# Altium PCB LM-003.PcbDoc (part 1 of 2)
Units mm, origin at the board's own origin, x right, y up, seen from the top; angles counter-clockwise.
Board outline 67.01 x 194 mm, 6 copper layers (Top Layer, +5V, Mid-Layer 1, +3.3V, Mid-Layer 2, Bottom Layer), stack 1.23 mm thick; 53 components, 75 nets, 484 pads, 4 vias.
Unrouted connection lines stored in the file: 150.
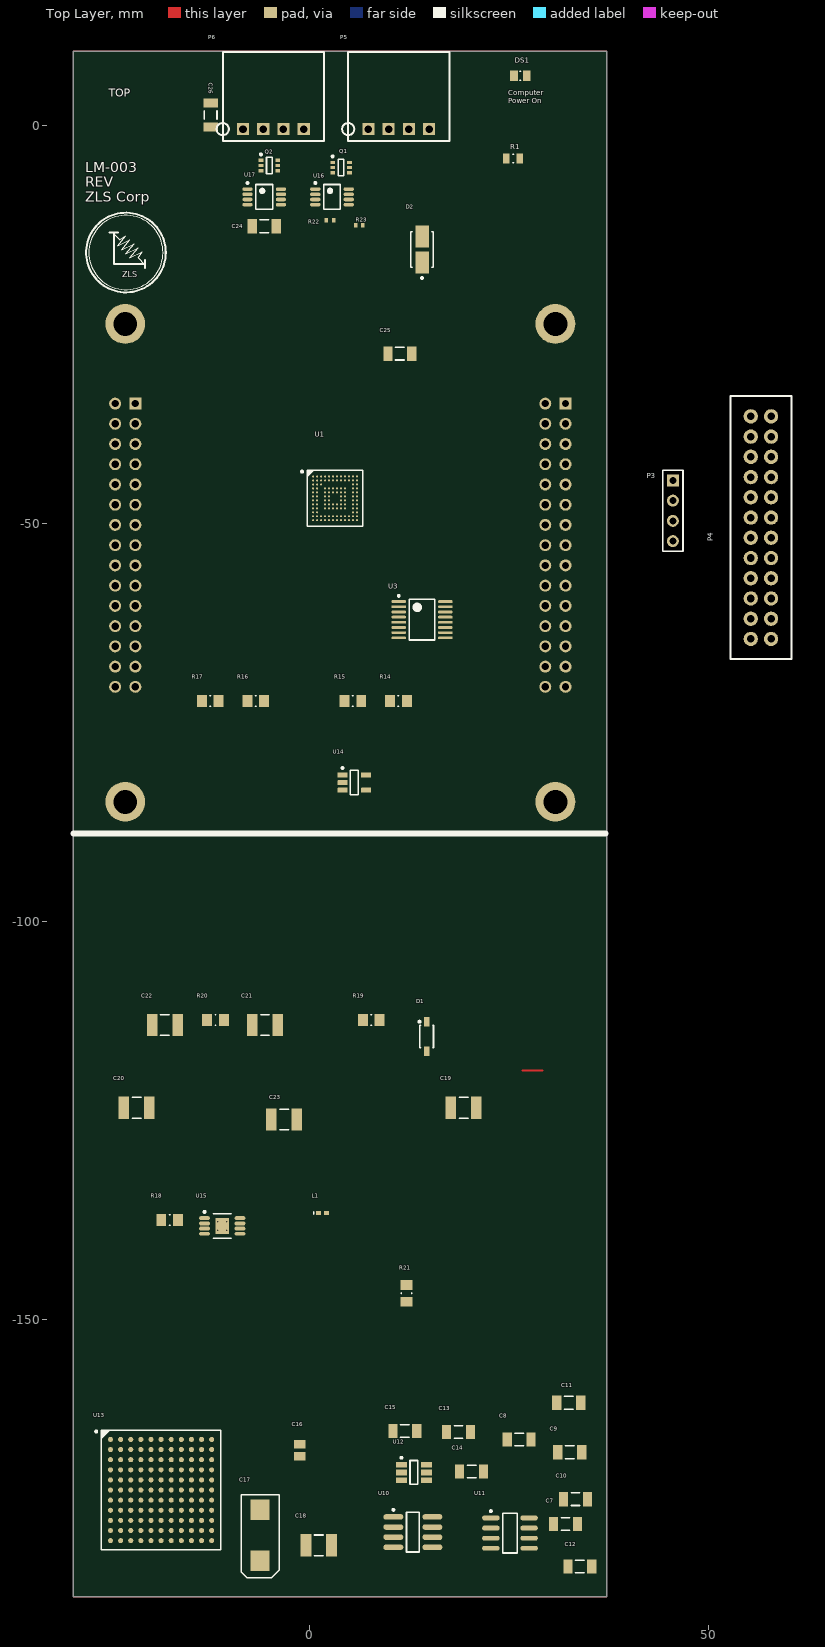
[diagram p0: Top Layer view]
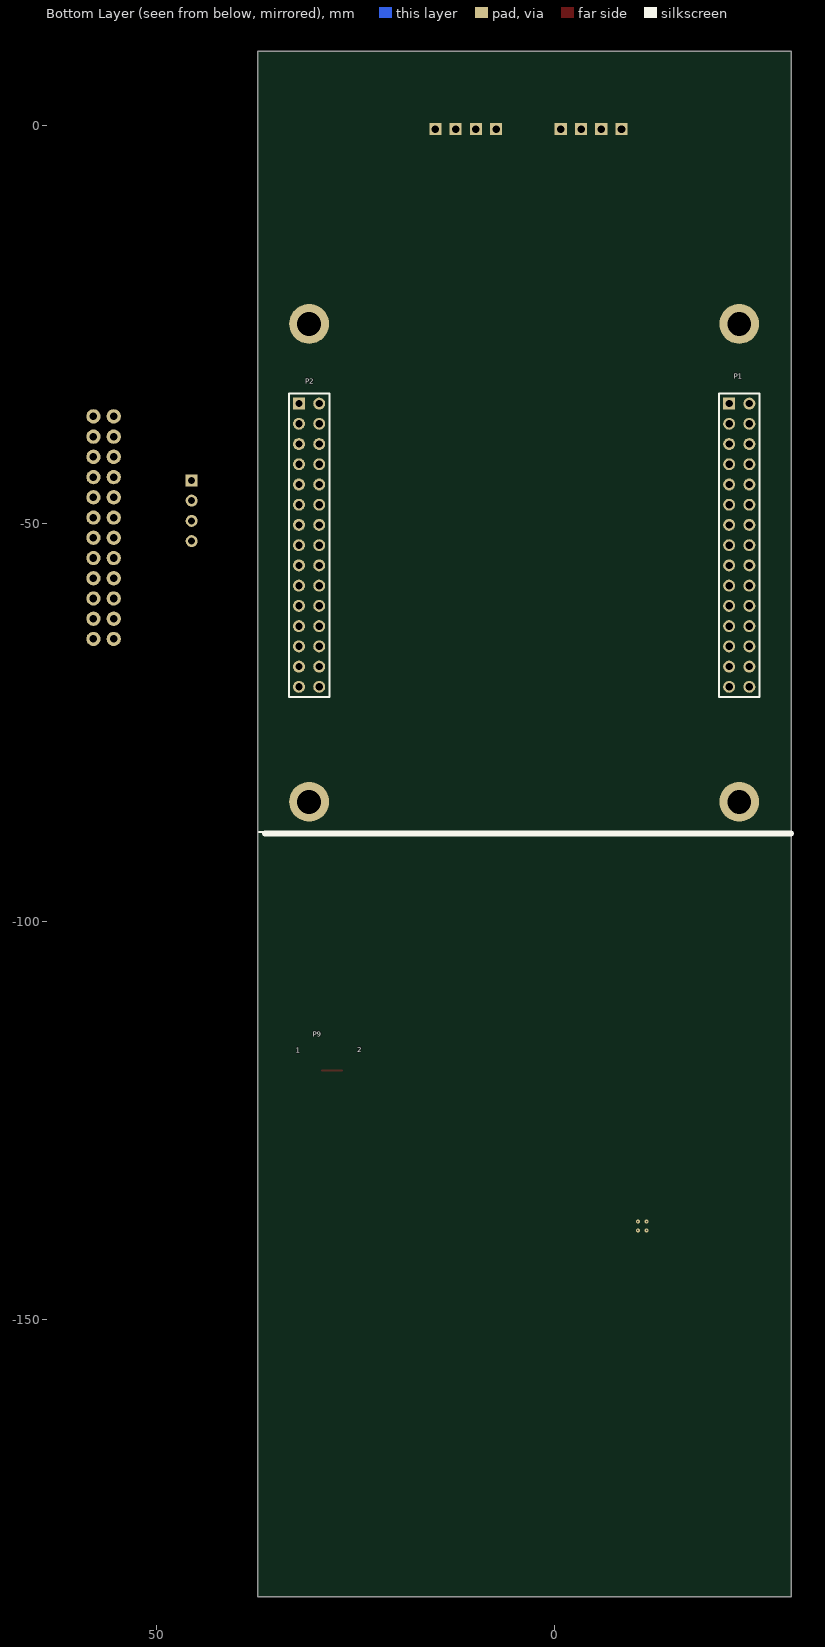
[diagram p1: Bottom Layer view, seen from below]
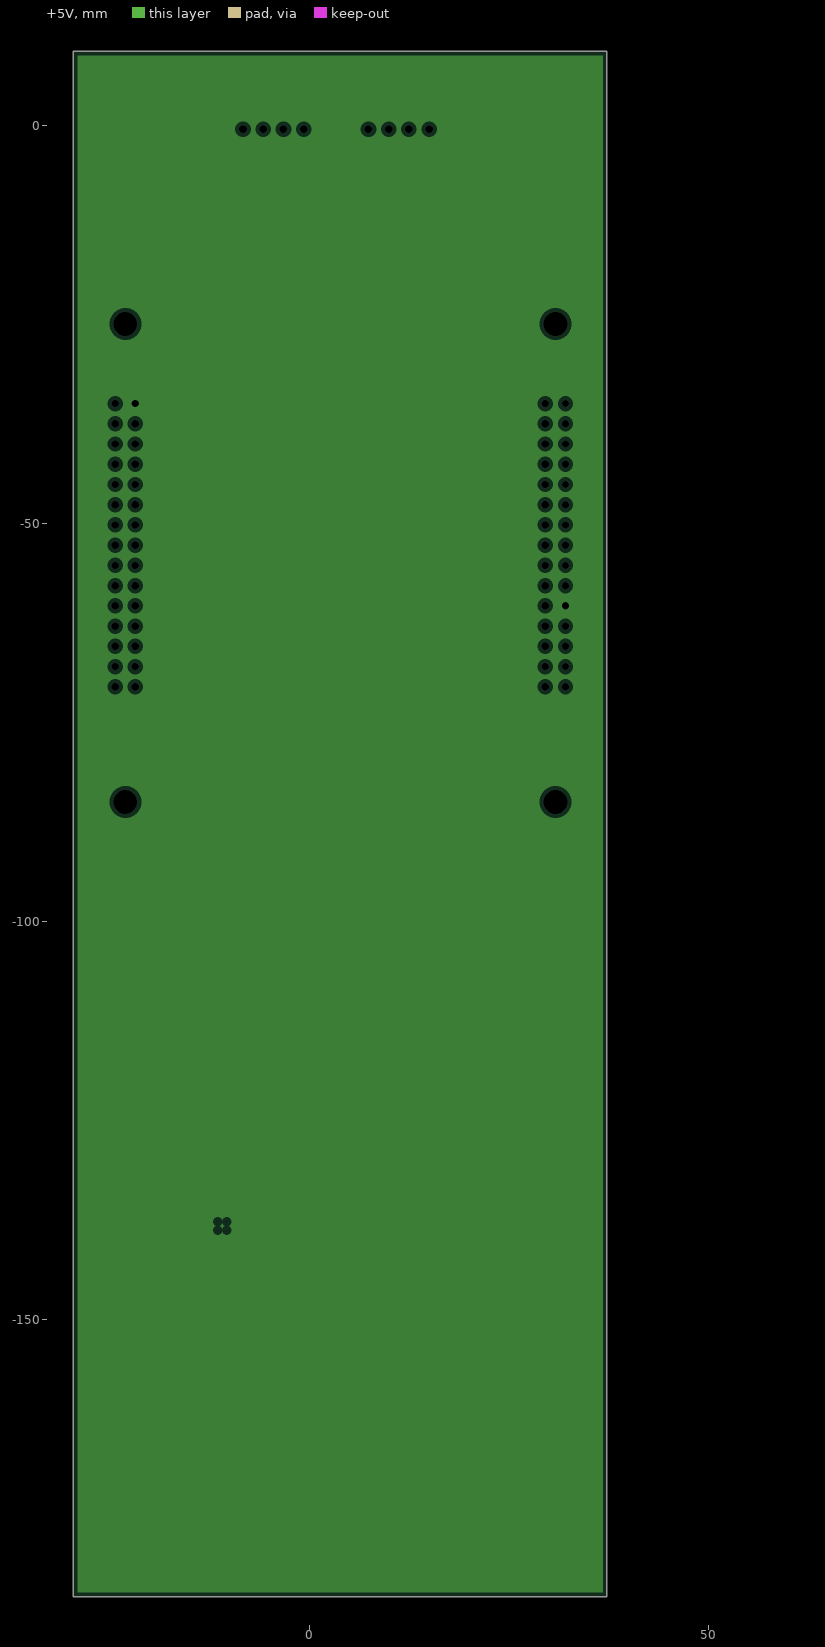
[diagram p2: +5V, clearances drawn from the general rule]
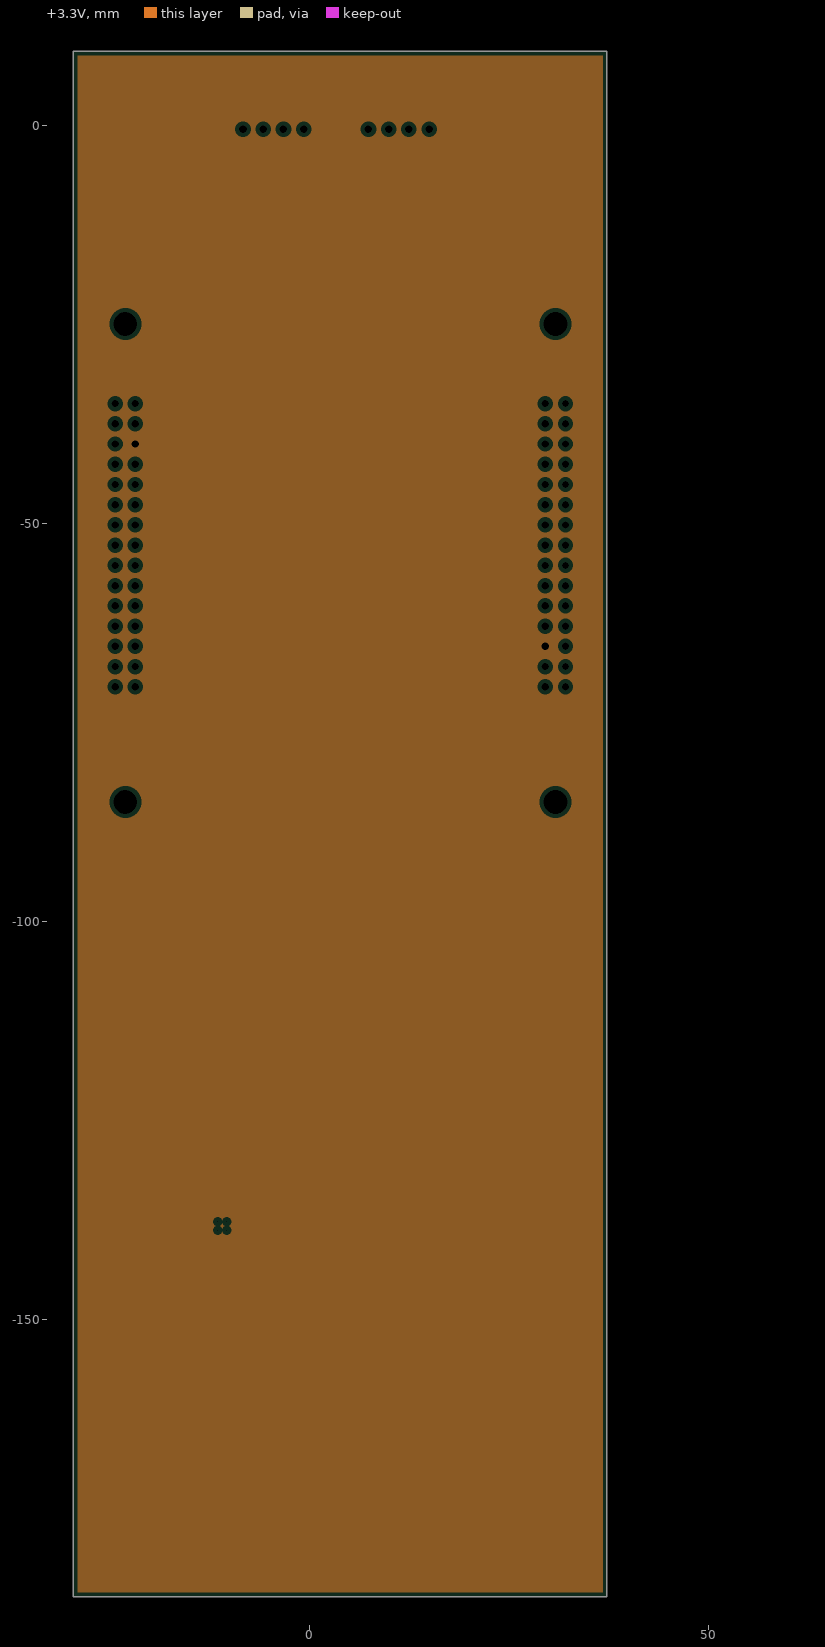
[diagram p3: +3.3V, clearances drawn from the general rule]
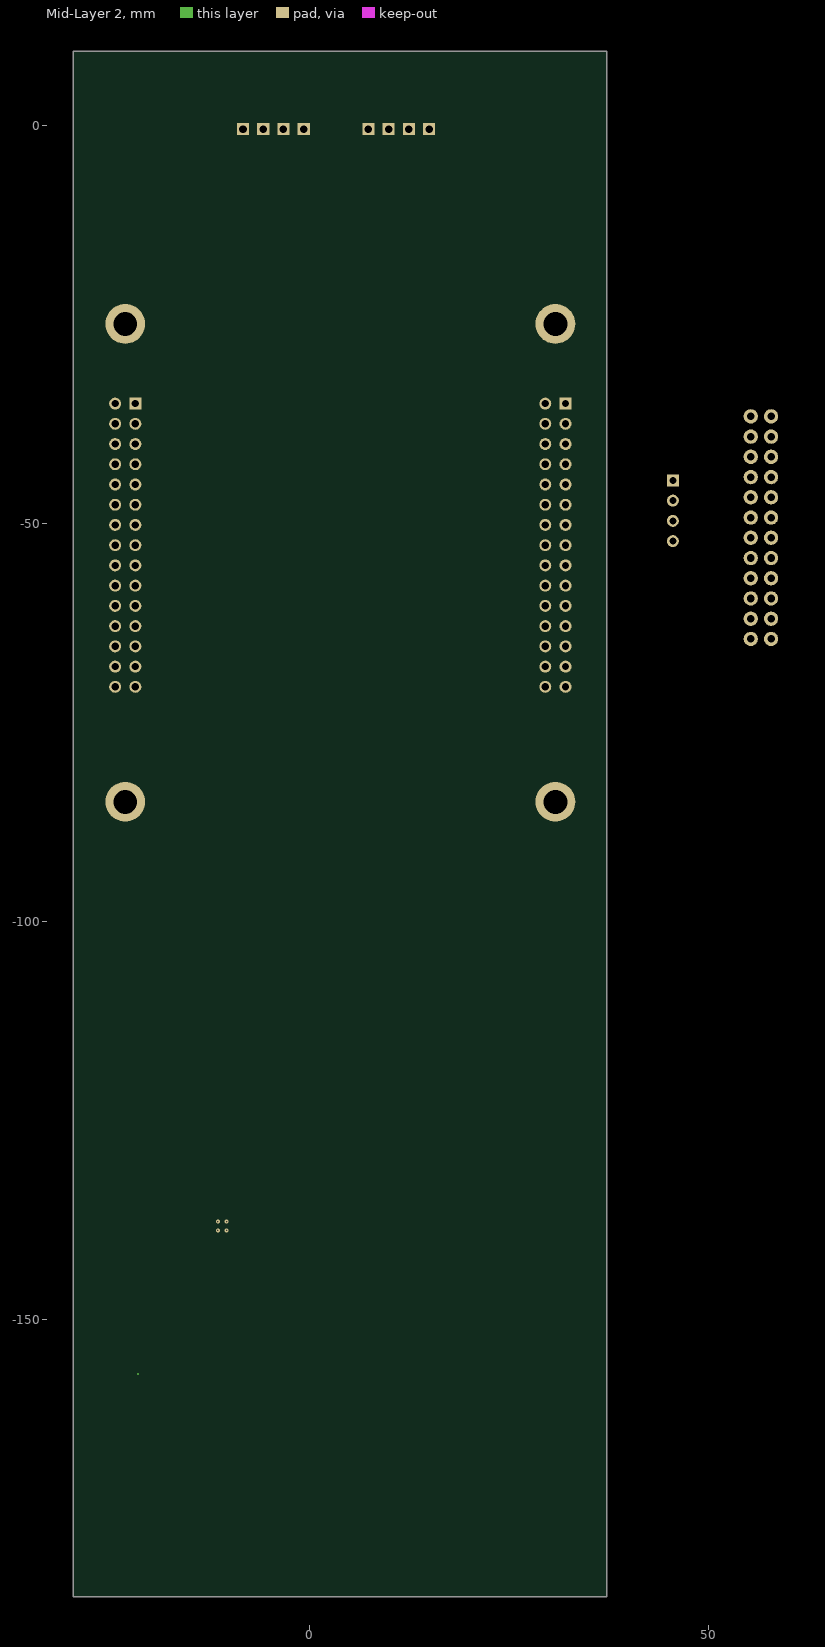
[diagram p4: Mid-Layer 2]

## Layer stack, top to bottom
Top Solder: solder mask 0.0102, Solder Resist, Dk 3.5
Top Layer: signal copper 0.0356
Dielectric 1: core 0.254, FR-4, Dk 4.2
+5V: plane copper 0.036, net +5
Dielectric 7: prepreg 0.127, Dk 4.2
Mid-Layer 1: signal copper 0.0356
Dielectric 6: core 0.254, Dk 4.2
+3.3V: plane copper 0.036, net +3.3
Dielectric2: prepreg 0.127, FR-4, Dk 4.2
Mid-Layer 2: signal copper 0.0356
Dielectric 5: core 0.254, Dk 4.2
Bottom Layer: signal copper 0.0356
Bottom Solder: solder mask 0.0102, Solder Resist, Dk 3.5

## Board outline
-29.695,-184.767 37.31,-184.767 37.31,9.234 -29.695,9.234

## Design rules (kind name [scope] priority, off if disabled: settings)
Clearance [All] p1: gap=0.127 ignorepadtopadclearanceinfootprint=FALSE except(0: Arc-Hole Track-Hole SMDPad-Hole THPad-Hole Via-Hole Fill-Hole Poly-Hole Region-Hole Text-Hole)
ComponentClearance [All] p1: gap=0.229 collisioncheckmode=3 verticalgap=0.254 showdistances=FALSE
HoleSize [All] p1: absolutevalues=TRUE maxlimit=5 minlimit=0.127 maxpercent=80.000 minpercent=20.000
MinimumAnnularRing [All] p1: minimumring=0.254
MinimumSolderMaskSliver [All] p1: minsoldermaskwidth=0.051
PlaneClearance [All] p1: clearance=0.508
PlaneConnect [All] p1: planeconnectstyle=Relief reliefexpansion=0.508 reliefentries=4 reliefconductorwidth=0.254 reliefairgap=0.254
PolygonConnect [All] p1: connectstyle=Relief reliefconductorwidth=0.254 reliefentries=4 polygonreliefangle="90 Angle" airgapwidth=0.254
RoomDefinition 36V_HV_Supply [InComponentClass('36V_HV_Supply')] p1: confinementstyle=ConfineIn formatcopy=TRUE lockcomponents=FALSE outline -26.338,-156.587 24.462,-156.587 24.462,-107.692 -26.338,-107.692
RoomDefinition System_Supply [InComponentClass('System_Supply')] p2: confinementstyle=ConfineIn formatcopy=TRUE lockcomponents=FALSE outline 6.848,-183.507 36.322,-183.507 36.322,-157.853 6.848,-157.853
RoomDefinition Power_Input_FET [InComponentClass('Power_Input_FET')] p3: confinementstyle=ConfineIn formatcopy=TRUE lockcomponents=FALSE outline -14.478,-24.952 19.856,-24.952 19.856,13.081 -14.478,13.081
RoomDefinition 12_Supply [InComponentClass('12_Supply')] p4: confinementstyle=ConfineIn formatcopy=TRUE lockcomponents=FALSE outline -28.789,-184.023 5.091,-184.023 5.091,-161.798 -28.789,-161.798
RoutingVias [All] p1: holewidth=0.3 width=0.7 viastyle="Through Hole" minholewidth=0.1 minwidth=0.381 maxholewidth=0.711 maxwidth=1.27
SilkToSilkClearance [All] p1: silktosilkclearance=0.1
SilkToSolderMaskClearance [IsPad] p1: minsilkscreentomaskgap=0.064 clearancetoexposedcopper=TRUE
SolderMaskExpansion [All] p1: expansion=0.051
Width [All] p1: maxlimit=1 minlimit=0.127 preferedwidth=0.254
23 further rules are at their usual default settings.

## Classes and differential pairs
component class MCU: U1 U3
component class Power_Input_FET: C24 C25 C26 D2 P5 P6 Q1 Q2 R22 R23 U16 U17
component class 36V_HV_Supply: C19 C20 C21 C22 C23 D1 L1 R18 R19 R20 R21 U15
component class 12_Supply: C16 C17 C18 R14 R15 R16 R17 U13 U14
component class System_Supply: C7 C8 C9 C10 C11 C12 C13 C14 C15 U10 U11 U12
component class Connectors: DS1 P1 P2 P3 P4 P14 P16 P? R1

## Components (designator, comment, footprint, x,y, rotation, side; value= is the part's Value field where it differs from the comment)
C7 "CAP CER 1UF 50V X7R 1210" CAPC1206(3216)130_N 32.11,-175.641 r0 top
C8 "CAP CER 1UF 50V X7R 1210" CAPC1206(3216)130_N 26.289,-165.018 r0 top
C9 "1uF" CAPC1206(3216)130_N 32.639,-166.624 r0 top
C10 "1uF" CAPC1206(3216)130_N 33.356,-172.503 r0 top
C11 "CAP CER 1UF 50V X7R 1210" CAPC1206(3216)130_N 32.512,-160.401 r0 top
C12 "CAP CER 1UF 50V X7R 1210" CAPC1206(3216)130_N 33.909,-180.975 r0 top
C13 "CAP CER 10UF 6.3V X5R 1206" CAPC1206(3216)130_N 18.669,-164.084 r0 top
C14 "CAP CER 10UF 6.3V X5R 1206" CAPC1206(3216)130_N 20.32,-169.037 r0 top
C15 "CAP CER 1UF 10V X5R 0805" CAPC1206(3216)130_N 11.938,-163.957 r0 top
C16 "10uF" C0805 -1.259,-166.37 r90 top
C17 "68uF" AVX-CAPC7343_V -6.223,-177.038 r90 top
C18 "4.7uF" CAPC1210(3225)100_M 1.143,-178.308 r0 top
C19 "4.7uF" CAPC1210(3225)100_M 19.315,-123.366 r0 top
C20 "4.7uF" CAPC1210(3225)100_M -21.741,-123.366 r0 top
C21 "4.7uF" CAPC1210(3225)100_M -5.612,-112.989 r0 top
C22 "4.7uF" CAPC1210(3225)100_M -18.185,-112.989 r0 top
C23 "4.7uF" CAPC1210(3225)100_M -3.224,-124.837 r0 top
C24 "CAP CER 10UF 6.3V X5R 1206" CAPC1206(3216)130_N -5.715,-12.7 r0 top
C25 "CAP CER 10UF 6.3V X5R 1206" CAPC1206(3216)130_N 11.303,-28.702 r0 top
C26 "CAP CER 10UF 6.3V X5R 1206" CAPC1206(3216)130_N -12.446,1.27 r270 top
D1 "1N5819HW-7-F" DIOD-SOD-123-2_V 14.683,-114.423 r90 top
D2 "CDBA540-HF" VISH-DO-214AC-2_M 14.097,-15.621 r90 top
DS1 "Lite-On LTST-S220KGKT Green LED, 571 nm 2012 (0805) Side View, Rectangle Lens SMD package" 0805C_L 26.444,6.182 r0 top
L1 "Inductor" 0402-A 1.585,-136.566 r0 top value=10mH
P1 "SSW-115-23-G-D" SSW-115-23-G-D -21.89,-34.966 r270 bottom locked
P2 "SSW-115-23-G-D" SSW-115-23-G-D 32.11,-34.966 r270 bottom locked
P3 "TSW-104-14-G-S" HDR1X4 45.593,-44.613 r270 top
P4 "IPL1-112-01-F-S-K" IPL1-112-01-F-S-K 56.642,-50.546 r90 top
P5 "IPL1-104-01-L-S-RA-K" IPL1-104-01-L-S-RA-K 7.366,-0.508 r0 top
P6 "IPL1-104-01-L-S-RA-K" IPL1-104-01-L-S-RA-K -8.382,-0.508 r0 top
Q1 "MCH6336-TL-E" ONSC-MCPH-6_V 3.925,-5.334 r0 top
Q2 "MCH6336-TL-E" ONSC-MCPH-6_V -5.08,-5.08 r0 top
R1 "5.1K" RESC0805(2012)_L 25.527,-4.191 r0 top
R14 "RES SMD 100K OHM 1% 1/8W 0805" RESC0805(2012)_M 11.131,-72.308 r0 top
R15 "RES SMD 100K OHM 1% 1/8W 0805" RESC0805(2012)_M 5.416,-72.308 r0 top
R16 "RES SMD 11K OHM 1% 1/8W 0805" RESC0805(2012)_M -6.776,-72.308 r0 top
R17 "RES SMD 35K OHM 1% 1/8W 0805" RESC0805(2012)_M -12.491,-72.308 r0 top
R18 "RES SMD 100K OHM 1% 1/8W 0805" RESC0805(2012)_M -17.592,-137.455 r0 top
R19 "RES SMD 100K OHM 1% 1/8W 0805" RESC0805(2012)_M 7.723,-112.354 r0 top
R20 "RES SMD 100K OHM 1% 1/8W 0805" RESC0805(2012)_M -11.835,-112.354 r0 top
R21 "RES SMD 100K OHM 1% 1/8W 0805" RESC0805(2012)_M 12.143,-146.681 r90 top
R22 "560k" RESC0402(1005)_L 2.54,-11.938 r0 top
R23 "560k" RESC0402(1005)_L 6.223,-12.573 r0 top
U1 "MSP430F6637IZQWT" TI-ZQW113 3.175,-46.863 r0 top
U3 "ADG1608BRUZ" ADI-RU-16_M 14.097,-62.103 r0 top
U10 "LT1763CS8-5#PBF" LT-S8-8_M 12.944,-176.649 r0 top
U11 "LT1763CS8-3.3#TRPBF" LT-S8-8_N 25.136,-176.776 r0 top
U12 "LTC1983ES6-5#TRMPBF" SOT95P323X100-6N 13.081,-169.164 r0 top
U13 "LTM8055IY" LT-BGA-121-15000X15000X4920 -18.664,-171.368 r0 top
U14 "OPA188AIDBVR" DBV0005A_M 5.588,-82.55 r0 top
U15 "LT8570" LT8570-MSOP -10.988,-138.217 r0 top
U16 "LTC4414EMS8#TRPBF" LT-MS8-8_L 2.794,-9.017 r0 top
U17 "LTC4414EMS8#TRPBF" LT-MS8-8_L -5.715,-9.017 r0 top

## Footprints (in the part's own frame and the unit in brackets; to place one, negate y for a bottom-side part, rotate by r counter-clockwise, add the part's x,y. Pads: shape width x height; smd on the part's side, far side on the other; paste and mask are expansions set on the pad)
0402-A [mm] "Chip Inductor, Body 1.0x0.5mm, IPC High Density"
  rect 0.6x0.5 smd: 1(-0.5,0) 2(0.5,0)
  silkscreen extent -1.1,-0.15 -1.1,0.15, body extent -0.55,-0.3 0.55,0.3, height 0.55
0805C_L [mm]
  rect 0.95x1.35 smd: 1(-0.8,0) 2(0.8,0)
  silkscreen extent -0.05,-0.58 0.05,0.58, body extent -1.1,-0.72 1.1,0.72, height 0.75
ADI-RU-16_M [mm] "SOP, 16-Leads, Body 5x4.4mm, Pitch 0.65mm, IPC Low Density"
  oval 1.85x0.35 smd: 1(-2.925,2.275) 2(-2.925,1.625) 3(-2.925,0.975) 4(-2.925,0.325) 5(-2.925,-0.325) 6(-2.925,-0.975) 7(-2.925,-1.625) 8(-2.925,-2.275) 9(2.925,-2.275) 10(2.925,-1.625) 11(2.925,-0.975) 12(2.925,-0.325) 13(2.925,0.325) 14(2.925,0.975) 15(2.925,1.625) 16(2.925,2.275)
  silkscreen extent -3.05,-2.55 1.6,3.12, body extent -2.25,-2.55 2.25,2.55, height 1.2
AVX-CAPC7343_V [mm] "SMT Capacitor, 2 Leads, Body 7.3x4.3mm"
  rect 2.6x2.4 smd: 1(-3.202,0.007) 2(3.198,0.007)
  silkscreen extent -5.33,-2.4 5.08,2.4, body extent -3.49,-2.03 3.51,2.04, height 2.9
C0805 [mm] "Chip Capacitor, Body 2.0x1.3mm, IPC High Density"
  rect 1.1x1.4 smd: 1(-0.75,0) 2(0.75,0)
  body extent -1.1,-0.72 1.1,0.72, height 1.4
CAPC1206(3216)130_N [mm] "Chip Capacitor, Body 3.2x1.6mm, Height 1.3mm, IPC Medium Density"
  rect 1.15x1.8 smd: 1(-1.5,0) 2(1.5,0)
  silkscreen extent -0.55,-0.8 0.55,0.8, body extent -1.7,-0.9 1.7,0.9, height 1.3
CAPC1210(3225)100_M [mm] "Chip Capacitor, Body 3.2x2.5mm, Height 1mm, IPC Low Density"
  rect 1.35x2.8 smd: 1(-1.6,0) 2(1.6,0)
  silkscreen extent -0.55,-1.3 0.55,1.3, body extent -1.7,-1.35 1.7,1.35, height 1
DBV0005A_M [mm] "SOT23, 5-Leads, Body 3.05x1.75mm, Pitch 0.95mm, IPC Low Density"
  rrect15% 1.2x0.65 smd: 1(-1.475,0.95) 2(-1.475,0) 3(-1.475,-0.95) 4(1.475,-0.95) 5(1.475,0.95)
  silkscreen extent -1.6,-1.55 0.5,1.95, body extent -1.42,-1.46 1.42,1.46, height 1.08
DIOD-SOD-123-2_V [mm] "SOD-123, 2-Leads, Body 2.85x1.7mm (max), Pitch 3.7mm"
  rect 1.2x0.7 smd: 1(-1.85,0) 2(1.85,0)
  silkscreen extent -1.43,-0.85 1.97,1.02, body extent -1.42,-0.85 1.43,0.85, height 1.45
HDR1X4 [mm] "Connector; Header; 4 Position"
  rect 1.5x1.5 hole 0.9: 1(0,0)
  round 1.5 hole 0.9: 2(2.54,0) 3(5.08,0) 4(7.62,0)
  silkscreen extent -1.27,-1.27 8.89,1.27
IPL1-104-01-L-S-RA-K [mil]
  rect 60x60 hole 37.4: 1(0,0) 2(100,0) 3(200,0) 4(300,0)
  silkscreen extent -130,-59 400,380, body extent -80,-12 380,380, height 258
IPL1-112-01-F-S-K [mm]
  round 1.8 hole 0.95: 1(-13.97,-1.27) 2(-13.97,1.27) 3(-11.43,-1.27) 4(-11.43,1.27) 5(-8.89,-1.27) 6(-8.89,1.27) 7(-6.35,-1.27) 8(-6.35,1.27) 9(-3.81,-1.27) 10(-3.81,1.27) 11(-1.27,-1.27) 12(-1.27,1.27) 13(1.27,-1.27) 14(1.27,1.27) 15(3.81,-1.27) 16(3.81,1.27) 17(6.35,-1.27) 18(6.35,1.27) 19(8.89,-1.27) 20(8.89,1.27) 21(11.43,-1.27) 22(11.43,1.27) 23(13.97,-1.27) 24(13.97,1.27)
  silkscreen extent -16.51,-3.81 16.51,3.81, body extent -15.95,-4.32 16.05,3.56, height 8.13
LT8570-MSOP [mm]
  oval 1.35x0.5 smd: 1(-2.225,0.975) 2(-2.225,0.325) 3(-2.225,-0.325) 4(-2.225,-0.975) 5(2.225,-0.975) 6(2.225,-0.325) 7(2.225,0.325) 8(2.225,0.975)
  rect 1.75x1.96 smd: 9(0,0)
  silkscreen extent -2.35,-1.55 1.15,1.9, body extent -2.45,-1.55 2.45,1.55, height 1.1
LT-BGA-121-15000X15000X4920 [mm] "BGA, 121-Balls, Body 15x15mm, Pitch 1.27mm"
  round 0.635 smd: A1(-6.35,6.35) A2(-5.08,6.35) A3(-3.81,6.35) A4(-2.54,6.35) A5(-1.27,6.35) A6(0,6.35) A7(1.27,6.35) A8(2.54,6.35) A9(3.81,6.35) A10(5.08,6.35) A11(6.35,6.35) B1(-6.35,5.08) B2(-5.08,5.08) B3(-3.81,5.08) B4(-2.54,5.08) B5(-1.27,5.08) B6(0,5.08) B7(1.27,5.08) B8(2.54,5.08) B9(3.81,5.08) B10(5.08,5.08) B11(6.35,5.08) C1(-6.35,3.81) C2(-5.08,3.81) C3(-3.81,3.81) C4(-2.54,3.81) C5(-1.27,3.81) C6(0,3.81) C7(1.27,3.81) C8(2.54,3.81) C9(3.81,3.81) C10(5.08,3.81) C11(6.35,3.81) D1(-6.35,2.54) D2(-5.08,2.54) D3(-3.81,2.54) D4(-2.54,2.54) D5(-1.27,2.54) D6(0,2.54) D7(1.27,2.54) D8(2.54,2.54) D9(3.81,2.54) D10(5.08,2.54) D11(6.35,2.54) E1(-6.35,1.27) E2(-5.08,1.27) E3(-3.81,1.27) E4(-2.54,1.27) E5(-1.27,1.27) E6(0,1.27) E7(1.27,1.27) E8(2.54,1.27) E9(3.81,1.27) E10(5.08,1.27) E11(6.35,1.27) F1(-6.35,0) F2(-5.08,0) F3(-3.81,0) F4(-2.54,0) F5(-1.27,0) F6(0,0) F7(1.27,0) F8(2.54,0) F9(3.81,0) F10(5.08,0) F11(6.35,0) G1(-6.35,-1.27) G2(-5.08,-1.27) G3(-3.81,-1.27) G4(-2.54,-1.27) G5(-1.27,-1.27) G6(0,-1.27) G7(1.27,-1.27) G8(2.54,-1.27) G9(3.81,-1.27) G10(5.08,-1.27) G11(6.35,-1.27) H1(-6.35,-2.54) H2(-5.08,-2.54) H3(-3.81,-2.54) H4(-2.54,-2.54) H5(-1.27,-2.54) H6(0,-2.54) H7(1.27,-2.54) H8(2.54,-2.54) H9(3.81,-2.54) H10(5.08,-2.54) H11(6.35,-2.54) J1(-6.35,-3.81) J2(-5.08,-3.81) J3(-3.81,-3.81) J4(-2.54,-3.81) J5(-1.27,-3.81) J6(0,-3.81) J7(1.27,-3.81) J8(2.54,-3.81) J9(3.81,-3.81) J10(5.08,-3.81) J11(6.35,-3.81) K1(-6.35,-5.08) K2(-5.08,-5.08) K3(-3.81,-5.08) K4(-2.54,-5.08) K5(-1.27,-5.08) K6(0,-5.08) K7(1.27,-5.08) K8(2.54,-5.08) K9(3.81,-5.08) K10(5.08,-5.08) K11(6.35,-5.08) L1(-6.35,-6.35) L2(-5.08,-6.35) L3(-3.81,-6.35) L4(-2.54,-6.35) L5(-1.27,-6.35) L6(0,-6.35) L7(1.27,-6.35) L8(2.54,-6.35) L9(3.81,-6.35) L10(5.08,-6.35) L11(6.35,-6.35)
  silkscreen extent -8.27,-7.5 7.5,7.5, body extent -7.5,-7.5 7.5,7.5, height 5.12
LT-MS8-8_L [mm] "SOP, 8-Leads, Body 3.1x3.1mm, Pitch 0.65mm, IPC High Density"
  oval 1.3x0.45 smd: 1(-2.1,0.975) 2(-2.1,0.325) 3(-2.1,-0.325) 4(-2.1,-0.975) 5(2.1,-0.975) 6(2.1,-0.325) 7(2.1,0.325) 8(2.1,0.975)
  silkscreen extent -2.22,-1.55 1.05,1.87, body extent -1.55,-1.55 1.55,1.55, height 1.1
LT-S8-8_M [mm] "SOIC, 8-Leads, Body 4.9x3.9mm, Pitch 1.27mm, IPC Low Density"
  oval 2.5x0.7 smd: 1(-2.45,1.905) 2(-2.45,0.635) 3(-2.45,-0.635) 4(-2.45,-1.905) 5(2.45,-1.905) 6(2.45,-0.635) 7(2.45,0.635) 8(2.45,1.905)
  silkscreen extent -2.57,-2.5 0.8,2.93, body extent -2,-2.5 2,2.5, height 1.76
LT-S8-8_N [mm] "SOIC, 8-Leads, Body 4.9x3.9mm, Pitch 1.27mm, IPC Medium Density"
  oval 2.2x0.6 smd: 1(-2.4,1.905) 2(-2.4,0.635) 3(-2.4,-0.635) 4(-2.4,-1.905) 5(2.4,-1.905) 6(2.4,-0.635) 7(2.4,0.635) 8(2.4,1.905)
  silkscreen extent -2.52,-2.5 0.9,2.88, body extent -2,-2.5 2,2.5, height 1.76
ONSC-MCPH-6_V [mm] "SOT23, 6-Leads, Body 2x1.6mm, Pitch 0.65mm"
  rect 0.6x0.4 smd: 1(-1.05,0.65) 2(-1.05,0) 3(-1.05,-0.65) 4(1.05,-0.65) 5(1.05,0) 6(1.05,0.65)
  silkscreen extent -1.17,-1.03 0.35,1.52, body extent -0.8,-1 0.8,1, height 0.9
RESC0402(1005)_L [mm] "Chip Resistor, Body 1.0x0.5mm, IPC High Density"
  rect 0.45x0.55 smd: 1(-0.45,0) 2(0.45,0)
  body extent -0.52,-0.27 0.53,0.28, height 0.4
RESC0805(2012)_L [mm] "Chip Resistor, Body 2.0x1.3mm, IPC High Density"
  rect 0.85x1.3 smd: 1(-0.85,0) 2(0.85,0)
  silkscreen extent -0.05,-0.55 0.05,0.55, body extent -1.1,-0.67 1.1,0.68, height 0.7
RESC0805(2012)_M [mm] "Chip Resistor, Body 2.0x1.3mm, IPC Low Density"
  rect 1.25x1.5 smd: 1(-1.05,0) 2(1.05,0)
  silkscreen extent -0.05,-0.65 0.05,0.65, body extent -1.1,-0.67 1.1,0.67, height 0.7
SOT95P323X100-6N [mm] "SOT23, 6-Leads, Body 2.90x3.23mm, Pitch 0.95mm, IPC Medium Density"
  rect 1.4x0.7 smd: 1(-1.575,0.95) 2(-1.575,0) 3(-1.575,-0.95) 4(1.575,-0.95) 5(1.575,0) 6(1.575,0.95)
  silkscreen extent -1.7,-1.5 0.5,1.97, body extent -1.92,-1.5 1.92,1.5, height 1
SSW-115-23-G-D [mm]
  rect 1.5x1.5 hole 0.92: 1(0,0)
  round 1.5 hole 0.92: 2(0,2.54) 3(2.54,0) 4(2.54,2.54) 5(5.08,0) 6(5.08,2.54) 7(7.62,0) 8(7.62,2.54) 9(10.16,0) 10(10.16,2.54) 11(12.7,0) 12(12.7,2.54) 13(15.24,0) 14(15.24,2.54) 15(17.78,0) 16(17.78,2.54) 17(20.32,0) 18(20.32,2.54) 19(22.86,0) 20(22.86,2.54) 21(25.4,0) 22(25.4,2.54) 23(27.94,0) 24(27.94,2.54) 25(30.48,0) 26(30.48,2.54) 27(33.02,0) 28(33.02,2.54) 29(35.56,0) 30(35.56,2.54)
  silkscreen extent -1.27,-1.27 36.83,3.81, body extent -1.52,-1.27 37.08,3.68, height 8.51
TI-ZQW113 [mm] "BGA, 113-Balls, Body 7x7mm, Pitch 0.5mm"
  round 0.25 smd: A1(-2.75,2.75) A2(-2.25,2.75) A3(-1.75,2.75) A4(-1.25,2.75) A5(-0.75,2.75) A6(-0.25,2.75) A7(0.25,2.75) A8(0.75,2.75) A9(1.25,2.75) A10(1.75,2.75) A11(2.25,2.75) A12(2.75,2.75) B1(-2.75,2.25) B2(-2.25,2.25) B3(-1.75,2.25) B4(-1.25,2.25) B5(-0.75,2.25) B6(-0.25,2.25) B7(0.25,2.25) B8(0.75,2.25) B9(1.25,2.25) B10(1.75,2.25) B11(2.25,2.25) B12(2.75,2.25) C1(-2.75,1.75) C2(-2.25,1.75) C3(-1.75,1.75) C11(2.25,1.75) C12(2.75,1.75) D1(-2.75,1.25) D2(-2.25,1.25) D4(-1.25,1.25) D5(-0.75,1.25) D6(-0.25,1.25) D7(0.25,1.25) D8(0.75,1.25) D9(1.25,1.25) D11(2.25,1.25) D12(2.75,1.25) E1(-2.75,0.75) E2(-2.25,0.75) E4(-1.25,0.75) E5(-0.75,0.75) E6(-0.25,0.75) E7(0.25,0.75) E8(0.75,0.75) E9(1.25,0.75) E11(2.25,0.75) E12(2.75,0.75) F1(-2.75,0.25) F2(-2.25,0.25) F4(-1.25,0.25) F5(-0.75,0.25) F8(0.75,0.25) F9(1.25,0.25) F11(2.25,0.25) F12(2.75,0.25) G1(-2.75,-0.25) G2(-2.25,-0.25) G4(-1.25,-0.25) G5(-0.75,-0.25) G8(0.75,-0.25) G9(1.25,-0.25) G11(2.25,-0.25) G12(2.75,-0.25) H1(-2.75,-0.75) H2(-2.25,-0.75) H4(-1.25,-0.75) H5(-0.75,-0.75) H6(-0.25,-0.75) H7(0.25,-0.75) H8(0.75,-0.75) H9(1.25,-0.75) H11(2.25,-0.75) H12(2.75,-0.75) J1(-2.75,-1.25) J2(-2.25,-1.25) J4(-1.25,-1.25) J5(-0.75,-1.25) J6(-0.25,-1.25) J7(0.25,-1.25) J8(0.75,-1.25) J9(1.25,-1.25) J11(2.25,-1.25) J12(2.75,-1.25) K1(-2.75,-1.75) K2(-2.25,-1.75) K11(2.25,-1.75) K12(2.75,-1.75) L1(-2.75,-2.25) L2(-2.25,-2.25) L3(-1.75,-2.25) L4(-1.25,-2.25) L5(-0.75,-2.25) L6(-0.25,-2.25) L7(0.25,-2.25) L8(0.75,-2.25) L9(1.25,-2.25) L10(1.75,-2.25) L11(2.25,-2.25) L12(2.75,-2.25) M1(-2.75,-2.75) M2(-2.25,-2.75) M3(-1.75,-2.75) M4(-1.25,-2.75) M5(-0.75,-2.75) M6(-0.25,-2.75) M7(0.25,-2.75) M8(0.75,-2.75) M9(1.25,-2.75) M10(1.75,-2.75) M11(2.25,-2.75) M12(2.75,-2.75)
  silkscreen extent -4.27,-3.5 3.5,3.5, body extent -3.5,-3.5 3.5,3.5, height 1
VISH-DO-214AC-2_M [mm] "DO-214AC, 2-Leads, Body 4.5x2.79mm, IPC Low Density"
  rect 2.8x1.7 smd: 1(-1.625,0) 2(1.625,0)
  silkscreen extent -3.7,-1.4 2.25,1.4, body extent -2.25,-1.39 2.25,1.4, height 2.29

## Part data
C7 C8: library part CMP-1037-04913-1, Capacitance=10µF, Manufacturer="Murata Electronics North America", Manufacturer Part Number=GRM32RR71H105KA01L, Operating Temperature="-55°C ~ 125°C", Package / Case="1210 (3225 Metric)", Ratings=-, Supplier Part Number 1=490-1863-6-ND, Temperature Coefficient=X7R, Tolerance=±10%, Voltage - Rated=50V, Applications="General Purpose", Category=Capacitors, ComponentLink1Description=http://search.murata.co.jp/Ceramy/image/img/A01X/G101/ENG/GRM32RR71H105KA01-01.pdf, ComponentLink1URL=http://search.murata.co.jp/Ceramy/image/img/A01X/G101/ENG/GRM32RR71H105KA01-01.pdf, Features=-, Height - Seated (Max)=-, Lead Spacing=-, Lead Style=-, Mounting Type="Surface Mount, MLCC", Packaging=Digi-Reel®, Part Status=Active, Pricing 1="1=0.35, 10=0.242, 100=0.1449, 500=0.10868 (USD)", RoHS="RoHS Compliant", Size / Dimension="0.126\" L x 0.098\" W (3.20mm x 2.50mm)", Stock 1=66890, Supplier 1=Digi-Key, Thickness (Max)="0.079\" (2.00mm)"
C9 C10: library part CMP-1037-04913-1
C11 C12: library part CMP-1037-04913-1, Capacitance=10000pF, Manufacturer="Murata Electronics North America", Manufacturer Part Number=GRM32RR71H105KA01L, Operating Temperature="-55°C ~ 125°C", Package / Case="1210 (3225 Metric)", Ratings=-, Supplier Part Number 1=490-1863-6-ND, Temperature Coefficient=X7R, Tolerance=±10%, Voltage - Rated=50V, Applications="General Purpose", Category=Capacitors, ComponentLink1Description=http://search.murata.co.jp/Ceramy/image/img/A01X/G101/ENG/GRM32RR71H105KA01-01.pdf, ComponentLink1URL=http://search.murata.co.jp/Ceramy/image/img/A01X/G101/ENG/GRM32RR71H105KA01-01.pdf, Features=-, Height - Seated (Max)=-, Lead Spacing=-, Lead Style=-, Mounting Type="Surface Mount, MLCC", Packaging=Digi-Reel®, Part Status=Active, Pricing 1="1=0.35, 10=0.242, 100=0.1449, 500=0.10868 (USD)", RoHS="RoHS Compliant", Size / Dimension="0.126\" L x 0.098\" W (3.20mm x 2.50mm)", Stock 1=66890, Supplier 1=Digi-Key, Thickness (Max)="0.079\" (2.00mm)"
C13 C14: library part CMP-1037-04913-1, Capacitance=10uF, Manufacturer="Taiyo Yuden", Manufacturer Part Number=JMK316BJ106ML-T, Operating Temperature="-55°C ~ 85°C", Package / Case="1206 (3216 Metric)", Ratings=-, Supplier Part Number 1=587-5447-1-ND, Temperature Coefficient=X5R, Tolerance=±20%, Voltage - Rated=6.3V, Applications="SMPS Filtering", Category=Capacitors, ComponentLink1Description=http://ds.yuden.co.jp/TYCOMPAS/ut/detail.do?productNo=JMK316BJ106ML-T&fileName=JMK316BJ106ML-T_SS&mode=specSheetDownload, ComponentLink1URL=http://ds.yuden.co.jp/TYCOMPAS/ut/detail.do?productNo=JMK316BJ106ML-T&fileName=JMK316BJ106ML-T_SS&mode=specSheetDownload, Failure Rate=-, Features=-, Height - Seated (Max)=-, Lead Spacing=-, Lead Style=-, Mounting Type="Surface Mount, MLCC", Notification="Current market demand for these product types have resulted in fluctuating and extending lead times. Lead times may differ.", Packaging="Cut Tape (CT)", Part Status=Active, Pricing 1="1=0.24, 10=0.161, 100=0.0817, 500=0.05592, 1000=0.04946 (USD)", RoHS="RoHS Compliant", Size / Dimension="0.126\" L x 0.063\" W (3.20mm x 1.60mm)", Stock 1=5600, Supplier 1=Digi-Key, Thickness (Max)="0.071\" (1.80mm)"
C15: library part CMP-1037-04913-1, Capacitance=1µF, Manufacturer="Taiyo Yuden", Manufacturer Part Number=LMK212BJ105MD-T, Operating Temperature="-55°C ~ 85°C", Package / Case="0805 (2012 Metric)", Ratings=-, Supplier Part Number 1=587-4918-1-ND, Temperature Coefficient=X5R, Tolerance=±20%, Voltage - Rated=10V, Applications="SMPS Filtering", Category=Capacitors, ComponentLink1Description=http://ds.yuden.co.jp/TYCOMPAS/ut/detail.do?productNo=LMK212BJ105MD-T&fileName=LMK212BJ105MD-T_SS&mode=specSheetDownload, ComponentLink1URL=http://ds.yuden.co.jp/TYCOMPAS/ut/detail.do?productNo=LMK212BJ105MD-T&fileName=LMK212BJ105MD-T_SS&mode=specSheetDownload, Failure Rate=-, Features=-, Height - Seated (Max)=-, Lead Spacing=-, Lead Style=-, Mounting Type="Surface Mount, MLCC", Notification="Current market demand for these product types have resulted in fluctuating and extending lead times. Lead times may differ.", Packaging="Cut Tape (CT)", Part Status=Active, Pricing 1="1=0.17, 10=0.121, 100=0.0567, 500=0.03976, 1000=0.03291 (USD)", RoHS="RoHS Compliant", Size / Dimension="0.079\" L x 0.049\" W (2.00mm x 1.25mm)", Stock 1=2994, Supplier 1=Digi-Key, Thickness (Max)="0.037\" (0.95mm)"
C16: library part "Cap Pol3", "Polarized Capacitor (Surface Mount)"
C17: library part CMP-0279-00002-2, "CAP TANT POLY 68UF 25V 2917", Case/Package=2917, Case Code (Metric)=7343, ESR (Equivalent Series Resistance)=50mR, Leakage Current=170uA, Manufacturer="Kyocera AVX", Manufacturer Part Number=TCJE686M025R0050, Max Operating Temperature=105°C, Min Operating Temperature=-55°C, Package Quantity=400, Supplier Part Number 1=478-9471-6-ND, Tolerance=20%, Voltage Rating=25V, Capacitance=68uF, Case Code (Imperial)=2917, ComponentLink1Description="Manufacturer URL", ComponentLink1URL=http://www.avx.com/, ComponentLink2Description=Datasheet, ComponentLink2URL=http://www.avx.com/docs/Catalogs/taj.pdf, ComponentLink3Description=http://www.avx.com/docs/catalogs/tcj.pdf?src-supplier=Avnet, ComponentLink3URL=http://www.avx.com/docs/catalogs/tcj.pdf?src-supplier=Avnet, Depth=4.3mm, Dissipation Factor=6%, Features="General Purpose", Height=4.3mm, Height - Seated (Max)=0.169inch, Length=7.3mm, Life (Hours)=2000Hour, Mount="Surface Mount", Packaging="Tape and Reel", Pricing 1="1=3.92, 10=3.163, 100=2.4672 (USD)", Radiation Hardening=No, Stock 1=439, Supplier 1=Digi-Key, Termination=SMD/SMT, Voltage Rating (DC)=25V, Width=0.169inch
C18 C19 C20 C21 C22 C23: library part CMP-1038-00619-1, "CAP CER 4.7UF 50V X7R 1210", Case/Package=1210, Case Code (Metric)=3225, Dielectric=X7R, Manufacturer=Murata, Manufacturer Part Number=GCM32ER71H475KA55K, Max Operating Temperature=125°C, Min Operating Temperature=-55°C, Package Quantity=1, Ratings=AEC-Q200, Supplier Part Number 1=490-8066-6-ND, Tolerance=10%, Voltage Rating=50V, Capacitance=4.7uF, Case Code (Imperial)=1210, ComponentLink1Description=http://search.murata.co.jp/Ceramy/image/img/A01X/partnumbering_e_02.pdf?src-supplier=Digi-Key, ComponentLink1URL=http://search.murata.co.jp/Ceramy/image/img/A01X/partnumbering_e_02.pdf?src-supplier=Digi-Key, ComponentLink2Description=http://psearch.en.murata.com/capacitor/product/GCM32ER71H475KA55%23.pdf?src-supplier=Digi-Key, ComponentLink2URL=http://psearch.en.murata.com/capacitor/product/GCM32ER71H475KA55%23.pdf?src-supplier=Digi-Key, ComponentLink3Description=http://psearch.murata.com/capacitor/product/GCM32ER71H475KA55%23.pdf?src-supplier=Avnet, ComponentLink3URL=http://psearch.murata.com/capacitor/product/GCM32ER71H475KA55%23.pdf?src-supplier=Avnet, Depth=2.5mm, Height=2.5mm, Length=3.2mm, Mount="Surface Mount", Packaging="Tape and Reel", Pricing 1="1=1.8, 10=1.424, 100=1.0676, 500=0.80666, 1000=0.71177 (USD)", Radiation Hardening=No, Stock 1=63504, Supplier 1=Digi-Key, Termination=SMD/SMT, Thickness=0.106inch, Voltage Rating (DC)=50V, Width=0.098inch
C24: library part CMP-1037-04913-1, Capacitance=22pF, Manufacturer="Taiyo Yuden", Manufacturer Part Number=JMK316BJ106ML-T, Operating Temperature="-55°C ~ 85°C", Package / Case="1206 (3216 Metric)", Ratings=-, Supplier Part Number 1=587-5447-1-ND, Temperature Coefficient=X5R, Tolerance=±20%, Voltage - Rated=6.3V, Applications="SMPS Filtering", Category=Capacitors, ComponentLink1Description=http://ds.yuden.co.jp/TYCOMPAS/ut/detail.do?productNo=JMK316BJ106ML-T&fileName=JMK316BJ106ML-T_SS&mode=specSheetDownload, ComponentLink1URL=http://ds.yuden.co.jp/TYCOMPAS/ut/detail.do?productNo=JMK316BJ106ML-T&fileName=JMK316BJ106ML-T_SS&mode=specSheetDownload, Failure Rate=-, Features=-, Height - Seated (Max)=-, Lead Spacing=-, Lead Style=-, Mounting Type="Surface Mount, MLCC", Notification="Current market demand for these product types have resulted in fluctuating and extending lead times. Lead times may differ.", Packaging="Cut Tape (CT)", Part Status=Active, Pricing 1="1=0.24, 10=0.161, 100=0.0817, 500=0.05592, 1000=0.04946 (USD)", RoHS="RoHS Compliant", Size / Dimension="0.126\" L x 0.063\" W (3.20mm x 1.60mm)", Stock 1=5600, Supplier 1=Digi-Key, Thickness (Max)="0.071\" (1.80mm)"
C25 C26: library part CMP-1037-04913-1, Capacitance=.1uF, Manufacturer="Taiyo Yuden", Manufacturer Part Number=JMK316BJ106ML-T, Operating Temperature="-55°C ~ 85°C", Package / Case="1206 (3216 Metric)", Ratings=-, Supplier Part Number 1=587-5447-1-ND, Temperature Coefficient=X5R, Tolerance=±20%, Voltage - Rated=6.3V, Applications="SMPS Filtering", Category=Capacitors, ComponentLink1Description=http://ds.yuden.co.jp/TYCOMPAS/ut/detail.do?productNo=JMK316BJ106ML-T&fileName=JMK316BJ106ML-T_SS&mode=specSheetDownload, ComponentLink1URL=http://ds.yuden.co.jp/TYCOMPAS/ut/detail.do?productNo=JMK316BJ106ML-T&fileName=JMK316BJ106ML-T_SS&mode=specSheetDownload, Failure Rate=-, Features=-, Height - Seated (Max)=-, Lead Spacing=-, Lead Style=-, Mounting Type="Surface Mount, MLCC", Notification="Current market demand for these product types have resulted in fluctuating and extending lead times. Lead times may differ.", Packaging="Cut Tape (CT)", Part Status=Active, Pricing 1="1=0.24, 10=0.161, 100=0.0817, 500=0.05592, 1000=0.04946 (USD)", RoHS="RoHS Compliant", Size / Dimension="0.126\" L x 0.063\" W (3.20mm x 1.60mm)", Stock 1=5600, Supplier 1=Digi-Key, Thickness (Max)="0.071\" (1.80mm)"
D1: library part CMP-0303-00003-1, "1.0 A Surface Mount Schottky Barrier Rectifier, 40 V, -65 to 125 degC, 2-Pin SOD-123 Package, RoHS, Tape and Reel", @ Terminal Temperature TT (degC)=90, Forward Voltage Drop VF (V)=0.45, Manufacturer="Diodes Inc", Maximum Average Rectified Current IO (A)=1, Maximum Reverse Current IR (uA)=50, Operating and Storage Temperature Range="-65 to 125 degC", Peak Forward Surge Current IFSM (A)=25, Peak Repetitive Reverse Voltage VRRM (V)=40, @ IF (A)=1, @ VR (V)=40, ComponentLink1Description="Manufacturer URL", ComponentLink1URL=http://www.diodes.com/, ComponentLink2Description=Datasheet, ComponentLink2URL=http://www.diodes.com/datasheets/ds30217.pdf, DatasheetVersion="Rev. 15-2", Mounting Technology="Surface Mount", PackageDescription="2-Pin SOD-123, Body 2.7 x 1.55 mm, Pitch 3.7 mm", PackageReference=SOD-123-2, Packing="Tape and Reel", PartNumber=1N5819HW-7-F, RoHS=TRUE, Total Capacitance CT (pF)=50, VR (RMS) (V)=28
D2: library part "D Schottky", "DIODE SCHOTTKY 40V 5A DO214AB", Capacitance @ Vr, F="380pF @ 4V, 1MHz", Current - Average Rectified (Io)=5A, Manufacturer="Comchip Technology", Operating Temperature - Junction="-50°C ~ 150°C", Package / Case="DO-214AC, SMA", Supplier Device Package="DO-214AC (SMA)", Supplier Part Number 1=641-1707-6-ND, Category="Discrete Semiconductor Products", ComponentLink1Description=http://www.comchiptech.com/cms/UserFiles/CDBA540-HF%20Thru505315.%20CDBA5200-HF%20RevC.pdf, ComponentLink1URL=http://www.comchiptech.com/cms/UserFiles/CDBA540-HF%20Thru505315.%20CDBA5200-HF%20RevC.pdf, Diode Type=Schottky, Manufacturer Part Number=CDBA540-HF, Mounting Type="Surface Mount", Packaging=Digi-Reel®, Part Status=Active, Pricing 1="1=0.49, 10=0.381, 25=0.3208, 100=0.2612, 250=0.2164, 500=0.1791, 1000=0.13432, 2500=0.12313 (USD)", RoHS="RoHS Compliant", Speed="Fast Recovery =< 500ns, > 200mA (Io)", Stock 1=7367, Supplier 1=Digi-Key
DS1: library part "LED A/K", Case/Package=0805, Case Code (Metric)=2012, Colour=Green, Forward Current=20mA, Forward Voltage=2V, Lens Colour=Colorless, Manufacturer="Vishay / Lite-On", Manufacturer Part Number=LTST-S220KGKT, Max Operating Temperature=85°C, Min Operating Temperature=-55°C, Package Quantity=4000, Power Dissipation=75W, Power Rating=75mW, Supplier Part Number 1=160-1468-1-ND, Case Code (Imperial)=0805, ComponentLink1Description=https://datasheet.ciiva.com/11775/0900766b80dc0b70-11775441.pdf, ComponentLink1URL=https://datasheet.ciiva.com/11775/0900766b80dc0b70-11775441.pdf, ComponentLink2Description=https://datasheet.ciiva.com/2110/s-110-ltst-s220kgkt-2110069.pdf, ComponentLink2URL=https://datasheet.ciiva.com/2110/s-110-ltst-s220kgkt-2110069.pdf, ComponentLink3Description=https://datasheet.ciiva.com/2110/s-110-ltst-s220kgkt-2110070.pdf, ComponentLink3URL=https://datasheet.ciiva.com/2110/s-110-ltst-s220kgkt-2110070.pdf, ComponentLink4Description=https://datasheet.ciiva.com/12400/100-ltst-s220kgkt-59602-12400886.pdf, ComponentLink4URL=https://datasheet.ciiva.com/12400/100-ltst-s220kgkt-59602-12400886.pdf, ComponentLink5Description=https://datasheet.ciiva.com/2110/s-110-ltst-s220kgkt-2110071.pdf, ComponentLink5URL=https://datasheet.ciiva.com/2110/s-110-ltst-s220kgkt-2110071.pdf, ComponentLink6Description=https://datasheet.ciiva.com/16379/ltst-s220kgkt-16379082.pdf, ComponentLink6URL=https://datasheet.ciiva.com/16379/ltst-s220kgkt-16379082.pdf, Depth=0.6mm, Dominant Wavelength=568nm, Height=0.6mm, Illumination Colour=Green, Lead Free="Lead Free", Length=2.1mm, Lens Style=Diffused,Colorless, Lens Transparency=Clear, Luminous Intensity=35mcd, Mount="Surface Mount", Number of Elements=1, Number of LEDs=1, Number of Pins=2, Packaging="Tape and Reel", Pricing 1="1=0.29, 10=0.212, 25=0.1564, 100=0.1117, 250=0.0759, 500=0.067, 1000=0.0525 (USD)", Radiation Hardening=No, Stock 1=74800, Supplier 1=Digi-Key, Test Current=20mA, Viewing Angle=130°, Wavelength=574nm, Width=1mm
P1 P2: library part "Header 15X2", "Header, 15-Pin, Dual row", Current Rating="5.7A per Contact", Insulation Color=Black, Manufacturer="Samtec Inc.", Material Flammability Rating="UL94 V-0", Operating Temperature="-55°C ~ 125°C", Supplier Part Number 1=SSW-115-23-G-D-ND, Voltage Rating=-, Applications=-, Category="Connectors, Interconnects", Connector Type=Receptacle, Contact Finish - Mating=Gold, Contact Finish - Post=Gold, Contact Finish Thickness - Mating="20.0µin (0.51µm)", Contact Finish Thickness - Post="3.00µin (0.076µm)", Contact Length - Post="0.394\" (10.00mm)", Contact Material="Phosphor Bronze", Contact Shape=Square, Contact Type=Forked, Fastening Type=Push-Pull, Features=-, Ingress Protection=-, Insulation Height="0.335\" (8.51mm)", Insulation Material="Liquid Crystal Polymer (LCP)", Manufacturer Part Number=SSW-115-23-G-D, Mated Stacking Heights=-, Mounting Type="Through Hole", Number of Positions=30, Number of Positions Loaded=All, Packaging=Bulk, Part Status=Active, Pitch - Mating="0.100\" (2.54mm)", Pricing 1="1=5.3 (USD)", RoHS="RoHS Compliant", Row Spacing - Mating="0.100\" (2.54mm)", Stock 1=0, Style="Board to Board or Cable", Supplier 1=Digi-Key, Termination=Solder
P3: library part "Header 4", "Header, 4-Pin", Current Rating=-, Insulation Color=Black, Manufacturer="Samtec Inc.", Material Flammability Rating="UL94 V-0", Operating Temperature="-55°C ~ 125°C", Supplier Part Number 1=SAM1053-04-ND, Applications=-, Category="Connectors, Interconnects", ComponentLink1Description=http://suddendocs.samtec.com/prints/tsw-xxx-xx-xxx-x-xx-xxx-mkt.pdf, ComponentLink1URL=http://suddendocs.samtec.com/prints/tsw-xxx-xx-xxx-x-xx-xxx-mkt.pdf, Connector Type=Header, Contact Finish - Mating=Gold, Contact Finish - Post=Gold, Contact Finish Thickness - Mating="10.0µin (0.25µm)", Contact Finish Thickness - Post="3.00µin (0.076µm)", Contact Length - Mating="0.320\" (8.13mm)", Contact Length - Post="0.110\" (2.79mm)", Contact Material="Phosphor Bronze", Contact Shape=Square, Contact Type="Male Pin", Fastening Type=Push-Pull, Features=-, Ingress Protection=-, Insulation Height="0.100\" (2.54mm)", Insulation Material="Polybutylene Terephthalate (PBT)", Manufacturer Part Number=TSW-104-14-G-S, Mated Stacking Heights=-, Mounting Type="Through Hole", Number of Positions=4, Number of Positions Loaded=All, Number of Rows=1, Overall Contact Length="0.530\" (13.46mm)", Packaging=Bulk, Part Status=Active, Pitch - Mating="0.100\" (2.54mm)", Pricing 1="1=1.02, 10=0.915, 100=0.7537, 500=0.59578, 1000=0.51143, 5000=0.46657, 10000=0.44863 (USD)", RoHS="RoHS Compliant", Row Spacing - Mating=-, Shrouding=Unshrouded, Stock 1=278, Style="Board to Board or Cable", Supplier 1=Digi-Key, Termination=Solder, Voltage Rating=-
P4: "IPL1-112-01-F-D-K", Manufacturer="Samtec Inc.", Supplier Part Number 1=IPL1-112-01-F-S-K-ND, Category="Connectors, Interconnects", Manufacturer Part Number=IPL1-112-01-F-S-K, Part Status=Active, Pricing 1="1=2.63 (USD)", RoHS="RoHS Compliant", Stock 1=0, Supplier 1=Digi-Key
P5 P6: Current Rating=-, Insulation Color=Natural, Manufacturer="Samtec Inc.", Material Flammability Rating="UL94 V-0", Operating Temperature="-55°C ~ 125°C", Supplier Part Number 1=SAM9597-ND, Voltage Rating="675VAC, 954VDC", Applications=-, Category="Connectors, Interconnects", ComponentLink1Description=http://suddendocs.samtec.com/prints/ipl1-1xx-xx-xxx-s-xx-x-xx-mkt.pdf, ComponentLink1URL=http://suddendocs.samtec.com/prints/ipl1-1xx-xx-xxx-s-xx-x-xx-mkt.pdf, Connector Type=Header, Contact Finish - Mating=Gold, Contact Finish - Post=Tin, Contact Finish Thickness - Mating="10µin (0.25µm)", Contact Finish Thickness - Post=-, Contact Length - Mating="0.215\" (5.46mm)", Contact Length - Post="0.085\" (2.16mm)", Contact Material="Phosphor Bronze", Contact Shape=Square, Contact Type="Male Pin", Fastening Type="Locking Ramp", Features=-, Ingress Protection=-, Insulation Height="0.240\" (6.10mm)", Insulation Material="Liquid Crystal Polymer (LCP)", Manufacturer Part Number=IPL1-104-01-L-S-RA-K, Mated Stacking Heights=-, Mounting Type="Through Hole, Right Angle", Number of Positions=4, Number of Positions Loaded=All, Number of Rows=1, Overall Contact Length=-, Packaging=Tube, Part Status=Active, Pitch - Mating="0.100\" (2.54mm)", Pricing 1="1=2.53, 10=2.424, 100=2.02, 500=1.717, 1000=1.4645, 5000=1.313 (USD)", RoHS="RoHS Compliant", Row Spacing - Mating=-, Shrouding="Shrouded - 4 Wall", Stock 1=265, Style="Board to Cable/Wire", Supplier 1=Digi-Key, Termination=Solder
Q1 Q2: library part CMP-1058-00598-1, "P-Channel Power MOSFET, -12 V, -5 A, 43 mOhm, Single, 6-Pin MCPH, Pb-Free, Tape and Reel", Manufacturer="On Semiconductor", Package Type="SC-88FL / MCPH-6", Channel Polarity="P Channel", Ciss Typ (pF)=660, ComponentLink1Description="Manufacturer URL", ComponentLink1URL=http://www.onsemi.com/, ComponentLink2Description=Datasheet, ComponentLink2URL=http://www.onsemi.cn/pub_link/Collateral/MCH6336-D.PDF, ComponentLink3Description="Package Specification", ComponentLink3URL=http://www.onsemi.com/pub_link/Collateral/ENA1601-D.PDF, Configuration=Single, Coss Typ (pF)=210, Crss Typ (pF)=155, ID Max (A)=5, Mounting Technology="Surface Mount", PackageDescription="6-Pin Small Outline Transistor, Body 2 x 1.6 mm, Pitch 0.65 mm", PackageReference=MCPH-6, Packing="Tape and Reel", PartNumber=MCH6336-TL-E, PD Max (W)=1.5, RoHS=Pb-Free, V(BR)DSS Min (V)=12, VGS(th) Max (V)=1.4, VGS Max (V)=10
R1: library part CMP-1013-00215-1, "RES SMD 5.1K OHM 5% 1/8W 0805", Manufacturer="Vishay Dale", Manufacturer Part Number=CRCW08055K10JNEA, Operating Temperature="-55°C ~ 155°C", Package / Case="0805 (2012 Metric)", Power (Watts)="0.125W, 1/8W", Supplier Device Package=0805, Supplier Part Number 1=541-5.1KACT-ND, Temperature Coefficient=±200ppm/°C, Tolerance=±5%, Category=Resistors, ComponentLink1Description=http://www.vishay.com/docs/20035/dcrcwe3.pdf, ComponentLink1URL=http://www.vishay.com/docs/20035/dcrcwe3.pdf, Composition="Thick Film", Failure Rate=-, Features="Automotive AEC-Q200", Height - Seated (Max)="0.020\" (0.50mm)", Packaging="Cut Tape (CT)", Part Status=Active, Pricing 1="1=0.1, 10=0.044, 100=0.0178, 1000=0.00802, 2500=0.00696 (USD)", RoHS="RoHS Compliant", Size / Dimension="0.079\" L x 0.049\" W (2.00mm x 1.25mm)", Stock 1=429, Supplier 1=Digi-Key
R14 R15 R18 R19 R20 R21: library part CMP-1013-00017-1, Case/Package=0805, Case Code (Metric)=2012, Manufacturer=Vishay, Manufacturer Part Number=CRCW0805100KFKEA, Max Operating Temperature=155°C, Min Operating Temperature=-55°C, Package Quantity=5000, Power Rating=125mW, Resistance=100K, Supplier Part Number 1=CRCW0805100KFKEA/BKN, Temperature Coefficient=100ppm/°C, Tolerance=1%, Voltage Rating=150V, Case Code (Imperial)=0805, ComponentLink1Description=https://datasheet.ciiva.com/11809/0900766b80d98b26-11809057.pdf, ComponentLink1URL=https://datasheet.ciiva.com/11809/0900766b80d98b26-11809057.pdf, ComponentLink2Description=https://datasheet.ciiva.com/7777/1697337-7777349.pdf, ComponentLink2URL=https://datasheet.ciiva.com/7777/1697337-7777349.pdf, ComponentLink3Description=https://datasheet.ciiva.com/3258/dcrcwe3-3258006.pdf, ComponentLink3URL=https://datasheet.ciiva.com/3258/dcrcwe3-3258006.pdf, ComponentLink4Description=https://datasheet.ciiva.com/16754/70201119-16754822.pdf, ComponentLink4URL=https://datasheet.ciiva.com/16754/70201119-16754822.pdf, ComponentLink5Description=https://datasheet.ciiva.com/8337/dcrcwe3-8337738.pdf, ComponentLink5URL=https://datasheet.ciiva.com/8337/dcrcwe3-8337738.pdf, ComponentLink6Description=https://datasheet.ciiva.com/16341/dcrcwe3-16341530.pdf, ComponentLink6URL=https://datasheet.ciiva.com/16341/dcrcwe3-16341530.pdf, ComponentLink7Description=https://datasheet.ciiva.com/16852/dcrcwe3-16852810.pdf, ComponentLink7URL=https://datasheet.ciiva.com/16852/dcrcwe3-16852810.pdf, ComponentLink8Description=https://datasheet.ciiva.com/16720/70201119-16720891.pdf, ComponentLink8URL=https://datasheet.ciiva.com/16720/70201119-16720891.pdf, ComponentLink9Description=https://datasheet.ciiva.com/7777/1720486-7777565.pdf, ComponentLink9URL=https://datasheet.ciiva.com/7777/1720486-7777565.pdf, Composition="Thick Film", Contact Plating=Tin, Depth=1.25mm, Height=0.45mm, Lead Free="Lead Free", Length=2mm, Military Standard=Not, Mount="Surface Mount", Number of Pins=2, Packaging="Tape and Reel", Pricing 1="1=0.1, 10=0.049, 25=0.042, 50=0.035, 100=0.028 (USD)", Radiation Hardening=No, REACH SVHC=Unknown, Stock 1=1317, Supplier 1=Avnet, Termination=SMD/SMT, Voltage Rating (DC)=150V, Weight=0.000194oz, Width=1.25mm
R16: library part CMP-1013-00017-1, Case/Package=0805, Case Code (Metric)=2012, Manufacturer="TE Connectivity Holsworthy", Manufacturer Part Number=CRG0805F11K, Max Operating Temperature=125°C, Min Operating Temperature=-55°C, Number of Resistors=1, Package Quantity=5000, Power Rating=125mW, Resistance=11kR, Supplier Part Number 1=A126334DKR-ND, Temperature Coefficient=100ppm/°C, Tolerance=1%, Voltage Rating=150V, Case Code (Imperial)=0805, ComponentLink1Description=https://datasheet.ciiva.com/11809/0900766b80d98b26-11809057.pdf, ComponentLink1URL=https://datasheet.ciiva.com/11809/0900766b80d98b26-11809057.pdf, ComponentLink2Description=https://datasheet.ciiva.com/7777/1697337-7777349.pdf, ComponentLink2URL=https://datasheet.ciiva.com/7777/1697337-7777349.pdf, ComponentLink3Description=https://datasheet.ciiva.com/3258/dcrcwe3-3258006.pdf, ComponentLink3URL=https://datasheet.ciiva.com/3258/dcrcwe3-3258006.pdf, ComponentLink4Description=https://datasheet.ciiva.com/16754/70201119-16754822.pdf, ComponentLink4URL=https://datasheet.ciiva.com/16754/70201119-16754822.pdf, ComponentLink5Description=https://datasheet.ciiva.com/8337/dcrcwe3-8337738.pdf, ComponentLink5URL=https://datasheet.ciiva.com/8337/dcrcwe3-8337738.pdf, ComponentLink6Description=https://datasheet.ciiva.com/16341/dcrcwe3-16341530.pdf, ComponentLink6URL=https://datasheet.ciiva.com/16341/dcrcwe3-16341530.pdf, ComponentLink7Description=https://datasheet.ciiva.com/16852/dcrcwe3-16852810.pdf, ComponentLink7URL=https://datasheet.ciiva.com/16852/dcrcwe3-16852810.pdf, ComponentLink8Description=https://datasheet.ciiva.com/16720/70201119-16720891.pdf, ComponentLink8URL=https://datasheet.ciiva.com/16720/70201119-16720891.pdf, ComponentLink9Description=https://datasheet.ciiva.com/7777/1720486-7777565.pdf, ComponentLink9URL=https://datasheet.ciiva.com/7777/1720486-7777565.pdf, ComponentLink10Description=http://www.mouser.com/ds/2/418/NG_CD_1623104_BA-655654.pdf?src-supplier=Mouser, ComponentLink10URL=http://www.mouser.com/ds/2/418/NG_CD_1623104_BA-655654.pdf?src-supplier=Mouser, Composition="Thick Film", ELV=Compliant, Height=0.55mm, Length=2mm, Mount="Surface Mount", Number of Terminations=2, Packaging="Tape and Reel", Pricing 1="1=0.1, 10=0.052, 100=0.021, 1000=0.00943, 2500=0.00819 (USD)", Stock 1=142510, Supplier 1=Digikey, Termination=Solder, Weight=0.000194oz, Width=1.25mm
R17: library part CMP-1013-00017-1, Case/Package=0805, Case Code (Metric)=2012, Manufacturer=Vishay, Manufacturer Part Number=CRCW080536K5FKEA, Max Operating Temperature=155°C, Max Power Dissipation=125mW, Min Operating Temperature=-55°C, Package Quantity=10, Resistance=36.5k, Supplier Part Number 1=541-36.5KCDKR-ND, Temperature Coefficient=100ppm/°C, Tolerance=1%, Voltage Rating=150V, Case Code (Imperial)=0805, ComponentLink1Description=https://datasheet.ciiva.com/11809/0900766b80d98b26-11809057.pdf, ComponentLink1URL=https://datasheet.ciiva.com/11809/0900766b80d98b26-11809057.pdf, ComponentLink2Description=https://datasheet.ciiva.com/7777/1697337-7777349.pdf, ComponentLink2URL=https://datasheet.ciiva.com/7777/1697337-7777349.pdf, ComponentLink3Description=https://datasheet.ciiva.com/3258/dcrcwe3-3258006.pdf, ComponentLink3URL=https://datasheet.ciiva.com/3258/dcrcwe3-3258006.pdf, ComponentLink4Description=https://datasheet.ciiva.com/16754/70201119-16754822.pdf, ComponentLink4URL=https://datasheet.ciiva.com/16754/70201119-16754822.pdf, ComponentLink5Description=https://datasheet.ciiva.com/8337/dcrcwe3-8337738.pdf, ComponentLink5URL=https://datasheet.ciiva.com/8337/dcrcwe3-8337738.pdf, ComponentLink6Description=https://datasheet.ciiva.com/16341/dcrcwe3-16341530.pdf, ComponentLink6URL=https://datasheet.ciiva.com/16341/dcrcwe3-16341530.pdf, ComponentLink7Description=https://datasheet.ciiva.com/16852/dcrcwe3-16852810.pdf, ComponentLink7URL=https://datasheet.ciiva.com/16852/dcrcwe3-16852810.pdf, ComponentLink8Description=https://datasheet.ciiva.com/16720/70201119-16720891.pdf, ComponentLink8URL=https://datasheet.ciiva.com/16720/70201119-16720891.pdf, ComponentLink9Description=https://datasheet.ciiva.com/7777/1720486-7777565.pdf, ComponentLink9URL=https://datasheet.ciiva.com/7777/1720486-7777565.pdf, ComponentLink10Description=http://www.mouser.com/ds/2/418/NG_CD_1623104_BA-655654.pdf?src-supplier=Mouser, ComponentLink10URL=http://www.mouser.com/ds/2/418/NG_CD_1623104_BA-655654.pdf?src-supplier=Mouser, ComponentLink11Description=http://uk.rs-online.com/webdocs/0d98/0900766b80d98b26.pdf?src-supplier=RSComponents, ComponentLink11URL=http://uk.rs-online.com/webdocs/0d98/0900766b80d98b26.pdf?src-supplier=RSComponents, ComponentLink12Description=https://www.verical.com/server-webapp/html/getDatasheet?partID=32738&src-supplier=Verical, ComponentLink12URL=https://www.verical.com/server-webapp/html/getDatasheet?partID=32738&src-supplier=Verical, ComponentLink13Description=http://www.farnell.com/datasheets/1697337.pdf?src-supplier=Farnell, ComponentLink13URL=http://www.farnell.com/datasheets/1697337.pdf?src-supplier=Farnell, ComponentLink14Description=http://www.vishay.com/docs/20035/dcrcwe3.pdf?src-supplier=Avnet, ComponentLink14URL=http://www.vishay.com/docs/20035/dcrcwe3.pdf?src-supplier=Avnet, ComponentLink15Description=http://www.farnell.com/datasheets/2111203.pdf?src-supplier=Element14, ComponentLink15URL=http://www.farnell.com/datasheets/2111203.pdf?src-supplier=Element14, ComponentLink16Description=https://www.alliedelec.com/m/d/0c934d6939ccefa68dbe0b96d821c8cf.pdf?src-supplier=Allied+Electronics, ComponentLink16URL=https://www.alliedelec.com/m/d/0c934d6939ccefa68dbe0b96d821c8cf.pdf?src-supplier=Allied+Electronics, ComponentLink17Description=http://www.vishay.com/docs/20035/dcrcwe3.pdf?src-supplier=Digi-Key, ComponentLink17URL=http://www.vishay.com/docs/20035/dcrcwe3.pdf?src-supplier=Digi-Key, ComponentLink18Description=http://www.farnell.com/datasheets/2049244.pdf?src-supplier=Element14, ComponentLink18URL=http://www.farnell.com/datasheets/2049244.pdf?src-supplier=Element14, ComponentLink19Description=http://www.vishay.com/docs/20035/dcrcwe3.pdf?src-supplier=Avnet+Europe, ComponentLink19URL=http://www.vishay.com/docs/20035/dcrcwe3.pdf?src-supplier=Avnet+Europe, Composition="Thick Film", Contact Plating=Tin, Depth=1.25mm, Features="Automotive AEC-Q200", Height=0.45mm, Length=2mm, Military Standard=Not, Number of Pins=2, Number of Terminations=2, Packaging="Tape and Reel", Power Rating=125mW, Pricing 1="1=0.1, 10=0.069, 100=0.028, 1000=0.01256, 2500=0.0109 (USD)", Radiation Hardening=No, REACH SVHC=Unknown, Stock 1=56622, Supplier 1=Digi-Key, Termination=SMD/SMT, Weight=0.000194oz, Width=1.25mm
R22 R23: library part CMP-1011-00927-1, Supplier Device Package=0402, Supplier Part Number 1=YAG3220CT-ND, Temperature Coefficient=±100ppm/°C, Tolerance=±1%
U1: library part CMP-0365-01413-1, "20 MHz Mixed Signal Microcontroller with 192 KB Flash, 16384 B SRAM and 74 GPIOs, -40 to 85 degC, 113-pin BGA (ZQW), Green (RoHS & no Sb/Br)", Frequency(MHz)=20, Manufacturer="Texas Instruments", Temp Sensor=Yes, ADC="12-bit SAR", ADC Channels=16, Brown Out Reset=Yes, Code_JEDEC=MO-225, Comparators=Yes, ComponentLink1Description="Manufacturer URL", ComponentLink1URL=http://www.ti.com/, ComponentLink2Description=Datasheet, ComponentLink2URL=http://www.ti.com/general/docs/lit/getliterature.tsp?genericPartNumber=MSP430F6637&fileType=pdf, ComponentLink3Description="Package Specification", ComponentLink3URL=http://www.ti.com/lit/ml/mpbg674/mpbg674.pdf, DAC=2, DatasheetVersion=SLAS566C, DMA=3, Eco-Plan="Green (RoHS & no Sb/Br)", Flash(KB)=192, GPIO=74, Mounting Technology="Surface Mount", Multiplier=32x32, PackageDescription="113-Pin Plastic Ball Grid Array Package, Body 7 x 7 mm, Pitch 0.5 mm", PackageReference=ZQW113, PackageVersion=4204599-3/D, PartId=1, PartNumber=MSP430F6637IZQWT, Real-Time Clock="Yes, with battery backup", SRAM(B)=16384, SubFamily="6 Series with LCD", SVS=Yes, Timers - 16-bit=4, USB=1, USCI_A (UART/LIN/IrDA/SPI)=2, USCI_B (I2C & SPI)=2, Watchdog=Yes
U3: library part CMP-0793-00136-1, "4.5 Ohm Ron, 8-Channel +/-5 V,+12 V, +5 V and +3.3 V Multiplexer, 16-pin SOP (RU-16), Tube", Base Part Number=ADG1608, Channel Capacitance (CS(off), CD(off))="19pF, 117pF", Current - Leakage (IS(off)) (Max)=100pA, Manufacturer="Analog Devices Inc.", On-State Resistance (Max)="4.5 Ohm", Operating Temperature="-40°C ~ 125°C (TA)", Package / Case="16-TSSOP (0.173\", 4.40mm Width)", Supplier Device Package=16-TSSOP, Supplier Part Number 1=ADG1608BRUZ-ND, Voltage - Supply, Dual (V±)="±3.3 V ~ 8 V", Voltage - Supply, Single (V+)="3.3 V ~ 16 V", -3db Bandwidth=40MHz, Category="Integrated Circuits (ICs)", Channel-to-Channel Matching (&Delta;Ron)="120 mOhm", Charge Injection=29pC, ComponentLink1Description=http://www.analog.com/media/en/technical-documentation/data-sheets/ADG1608_1609.pdf, ComponentLink1URL=http://www.analog.com/media/en/technical-documentation/data-sheets/ADG1608_1609.pdf, Crosstalk="-64dB @ 1MHz", Manufacturer Part Number=ADG1608BRUZ, Multiplexer/Demultiplexer Circuit=8:1, Packaging=Tube, Part Status=Active, Pricing 1="1=9.31, 96=8.01552, 192=6.95979, 576=6.0605 (USD)", RoHS="RoHS Compliant", Stock 1=1151, Supplier 1=Digi-Key, Switch Circuit=-, Switch Time (Ton, Toff) (Max)="94ns, 93ns"
U10: library part CMP-0476-01685-1, "500 mA, Low Noise, LDO Micropower Regulator, 1.8 to 20 V Vin, 5 V Vout, 8-pin SOIC (S8-8), -40 to 125 degC, Pb-Free", Dropout Voltage(V)=0.3, Manufacturer="Linear Technology", Output Voltage="5 V", Shutdown Current(uA)=1, ComponentLink1Description="Manufacturer URL", ComponentLink1URL=http://www.linear.com/, ComponentLink2Description=Datasheet, ComponentLink2URL=http://cds.linear.com/docs/en/datasheet/1763fg.pdf, ComponentLink3Description="Package Specification", ComponentLink3URL=http://cds.linear.com/docs/en/packaging/05081610_G_SO8.pdf, DatasheetVersion="Rev. G", Discrete Pass Element=no, Iout(mA)=500, Isupply(mA)=0.03, Mounting Technology="Surface Mount", Noise(uV)=20, Number of Outputs=1, PackageDescription="8-Pin Plastic Small Outline (Narrow .150 Inch), Body 4.9 x 3.9 mm, Pitch 1.27 mm", PackageReference=S8-8, PackageVersion="Rev. G, 03/2012", PartNumber=LT1763CS8-5#PBF, PSRR(dB)=65, RoHS=TRUE, Vin Max(V)=20, Vin Min(V)=1.8